# EAGLE board display_driver (EAGLE 7.1.0)
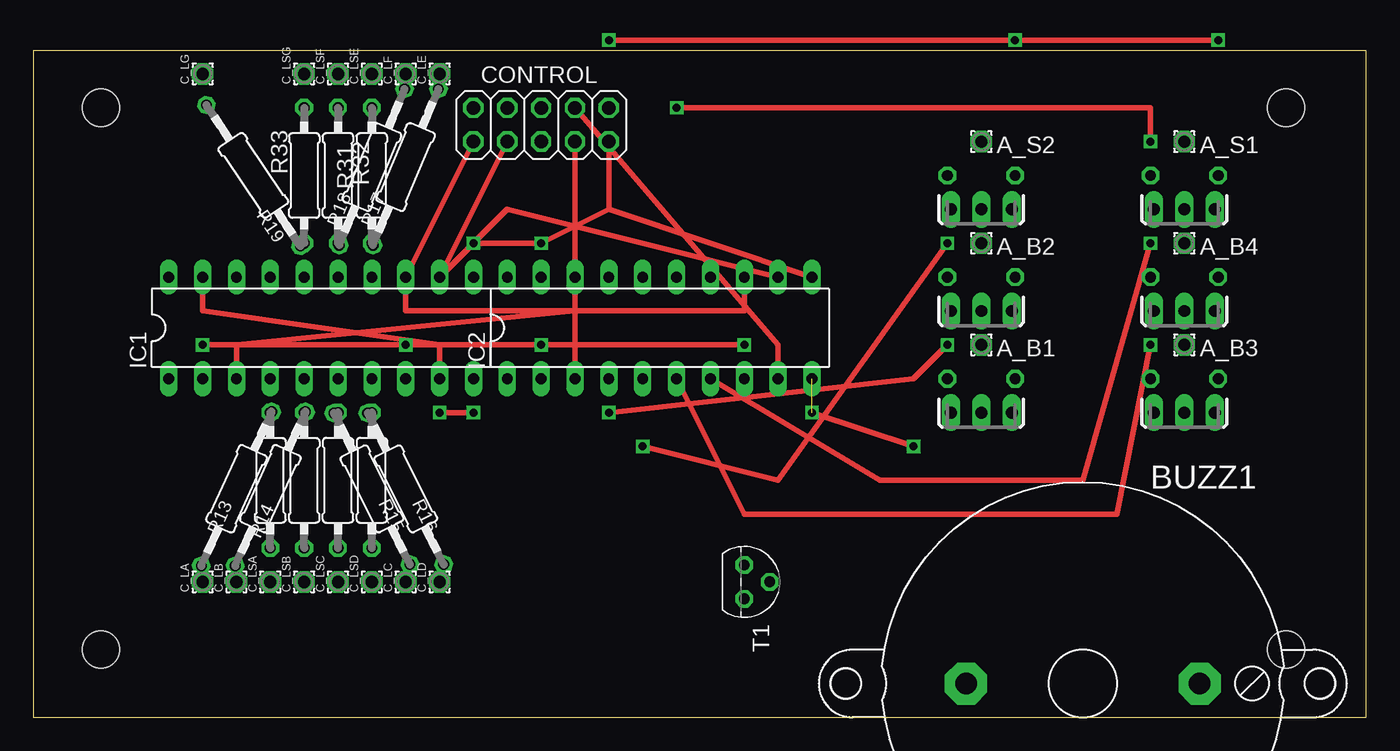
[diagram p0: board, top side]
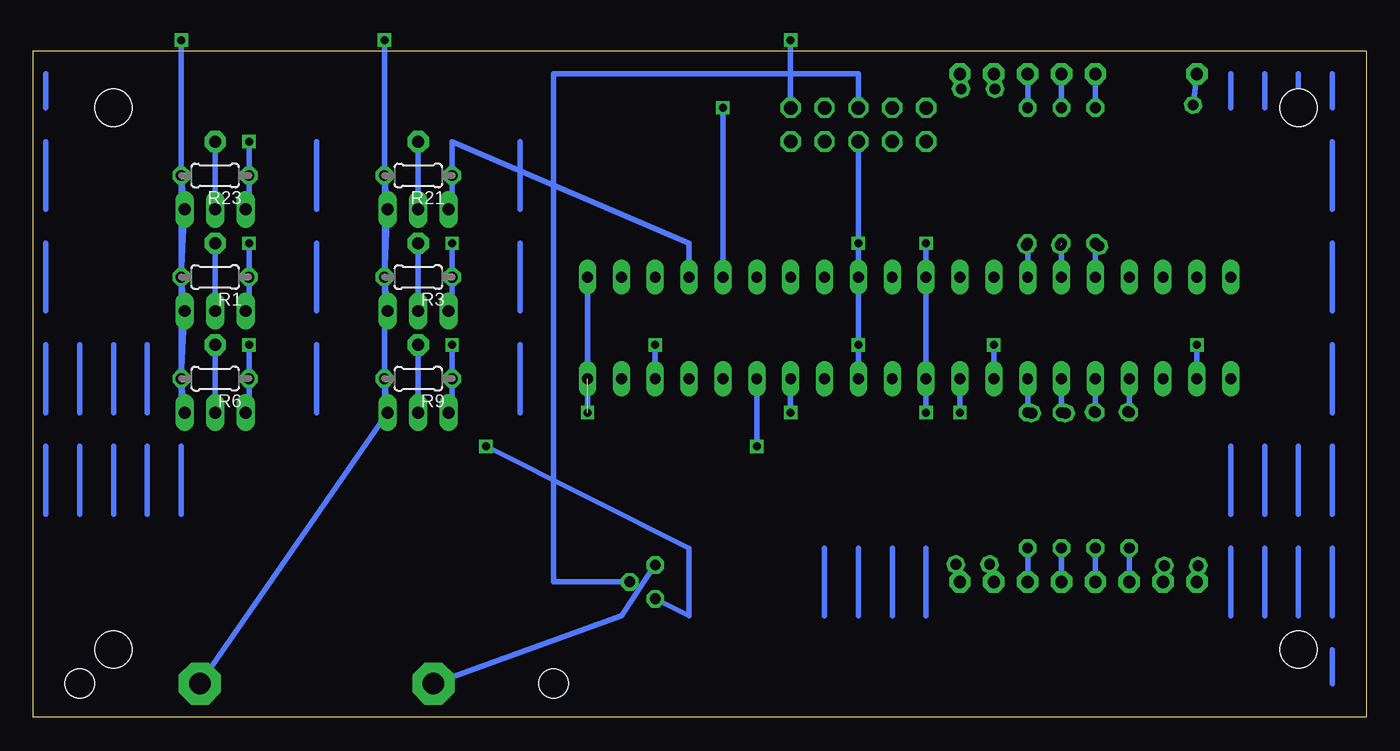
[diagram p1: board, bottom side, seen from below]

Size 100 x 50 mm. Coordinates in mm from the lower left corner, seen from the top.
Outline: 0,0 100,0 100,50 0,50 0,0
Copper layers (1*16): Top 0.035mm / dielectric 1.5mm / Bottom 0.035mm
Design rules "default *": minimum track width 10mil, minimum drill 24mil, track to track 8mil, track to pad 8mil, pad to pad 8mil, via to via 8mil, smd to smd 8mil, copper to edge 40mil, drill to drill 8mil, minimum pad ring 10mil, minimum via ring 8mil, stop-mask expansion 4mil, vias tented up to drill 0mil, thermal gap 10mil
Holes 2.8 mm at 93.98,5.08 93.98,45.72 5.08,5.08 5.08,45.72

## Footprints (pad centres in the part's own frame; a part is rotated, then mirrored left to right if it is on the bottom)
1,6/0,9 = drill 0.914 pad 1.6 octagon: 1 0,0
F/BC40 = drill 1.6 pad 3.15 octagon: + 8.763,0; - -8.763,0 | hole 2.21: 17.78,0; -17.78,0
2X05 = drill 1.016 octagon: 1 -5.08,-1.27; 2 -5.08,1.27; 3 -2.54,-1.27; 4 -2.54,1.27; 5 0,-1.27; 6 0,1.27; 7 2.54,-1.27; 8 2.54,1.27; 9 5.08,-1.27; 10 5.08,1.27
DIL20 = drill 0.813 long: 1 -11.43,-3.81; 2 -8.89,-3.81; 3 -6.35,-3.81; 4 -3.81,-3.81; 5 -1.27,-3.81; 6 1.27,-3.81; 7 3.81,-3.81; 8 6.35,-3.81; 9 8.89,-3.81; 10 11.43,-3.81; 11 11.43,3.81; 12 8.89,3.81; 13 6.35,3.81; 14 3.81,3.81; 15 1.27,3.81; 16 -1.27,3.81; 17 -3.81,3.81; 18 -6.35,3.81; 19 -8.89,3.81; 20 -11.43,3.81
TO251AA-V = drill 0.889 long: 1 -2.286,0; 2 0,0; 3 2.286,0
0204/5 = drill 0.813 octagon: 1 -2.54,0; 2 2.54,0
0207/12 = drill 0.813 octagon: 1 -6.35,0; 2 6.35,0
0207/10 = drill 0.813 octagon: 1 -5.08,0; 2 5.08,0
TO92 = drill 0.813 octagon: 1 1.27,0; 2 0,1.905; 3 -1.27,0

## Placement (x,y rotation side)
A_B1  [1,6/0,9]  71.12,27.94 0 top
A_B2  [1,6/0,9]  71.12,35.56 0 top
A_B3  [1,6/0,9]  86.36,27.94 0 top
A_B4  [1,6/0,9]  86.36,35.56 0 top
A_S1  [1,6/0,9]  86.36,43.18 0 top
A_S2  [1,6/0,9]  71.12,43.18 0 top
BUZZ1  F/BC40  [F/BC40]  78.74,2.54 0 top
C_LA  [1,6/0,9]  12.7,10.16 90 top
C_LB  [1,6/0,9]  15.24,10.16 90 top
C_LC  [1,6/0,9]  27.94,10.16 90 top
C_LD  [1,6/0,9]  30.48,10.16 90 top
C_LE  [1,6/0,9]  30.48,48.26 90 top
C_LF  [1,6/0,9]  27.94,48.26 90 top
C_LG  [1,6/0,9]  12.7,48.26 90 top
C_LSA  [1,6/0,9]  17.78,10.16 90 top
C_LSB  [1,6/0,9]  20.32,10.16 90 top
C_LSC  [1,6/0,9]  22.86,10.16 90 top
C_LSD  [1,6/0,9]  25.4,10.16 90 top
C_LSE  [1,6/0,9]  25.4,48.26 90 top
C_LSF  [1,6/0,9]  22.86,48.26 90 top
C_LSG  [1,6/0,9]  20.32,48.26 90 top
CONTROL  JP_1  [2X05]  38.1,44.45 0 top
IC1  TPIC6B595N  [DIL20]  21.59,29.21 0 top
IC2  TPIC6B595N  [DIL20]  46.99,29.21 0 top
Q1  IRFU9024V  [TO251AA-V]  71.12,22.86 0 top
Q2  IRFU9024V  [TO251AA-V]  71.12,30.48 0 top
Q3  IRFU9024V  [TO251AA-V]  86.36,22.86 0 top
Q4  IRFU9024V  [TO251AA-V]  86.36,30.48 0 top
Q5  IRFU9024V  [TO251AA-V]  86.36,38.1 0 top
Q6  IRFU9024V  [TO251AA-V]  71.12,38.1 0 top
R1  22k  [0204/5]  86.36,33.02 180 bottom
R3  22k  [0204/5]  71.12,33.02 180 bottom
R6  22k  [0204/5]  86.36,25.4 180 bottom
R9  22k  [0204/5]  71.12,25.4 180 bottom
R13  22R  [0207/12]  15.24,17.14 245.5 top
R14  22R  [0207/12]  17.78,17.14 245.5 top
R15  22R  [0207/12]  25.4,17.14 296.7 top
R16  22R  [0207/12]  27.94,17.14 296.7 top
R17  22R  [0207/12]  27.94,41.27 67.3 top
R18  22R  [0207/12]  25.4,41.27 67.3 top
R19  22R  [0207/12]  16.51,40.64 123.7 top
R21  22k  [0204/5]  71.12,40.64 180 bottom
R23  22k  [0204/5]  86.36,40.64 180 bottom
R27  56R  [0207/10]  17.78,17.78 270 top
R28  56R  [0207/10]  20.32,17.78 270 top
R29  56R  [0207/10]  22.86,17.78 270 top
R30  56R  [0207/10]  25.4,17.78 270 top
R31  56R  [0207/10]  25.4,40.64 90 top
R32  56R  [0207/10]  22.86,40.64 90 top
R33  56R  [0207/10]  20.32,40.64 90 top
T1  BC547  [TO92]  53.34,10.16 270 top

## Library data of the parts
A_B1-A_B4 A_S1 A_S2 C_LA C_LB C_LC C_LD C_LE C_LF C_LG C_LSA C_LSB C_LSC C_LSD C_LSE C_LSF C_LSG = wirepad
BUZZ1 = buzzer; OC_FARNELL: unknown; OC_NEWARK: unknown
CONTROL = pinhead
IC1 IC2 = NumericDisplay
Q1-Q6 = MINE
R1 R3 R6 R9 R13-R19 R21 R23 R27-R33 = resistor
T1 = transistor

## Nets
+12V: BUZZ1.+ CONTROL.10 Q1.3 Q2.3 Q3.3 Q4.3 Q5.3 Q6.3 R1.2 R3.2 R6.2 R9.2 R21.2 R23.2
B_1: IC2.4 Q1.1 R9.1
B_2: IC2.5 Q2.1 R3.1
B_3: IC2.6 Q3.1 R6.1
B_4: IC2.7 Q4.1 R1.1
BUZZ_CTL: CONTROL.6 T1.2
D0: IC1.4 R13.1 R27.1
D1: IC1.5 R14.1 R28.1
D2: IC1.6 R15.1 R29.1
D3: IC1.7 R16.1 R30.1
D4: IC1.14 R17.1 R31.1
D5: IC1.15 R18.1 R32.1
D6: IC1.16 R19.1 R33.1
G: CONTROL.8 IC2.9
GND: CONTROL.9 IC1.9 IC1.10 IC1.11 IC1.19 IC2.10 IC2.11 IC2.19 T1.1
L_A: C_LA.1 R13.2
L_B: C_LB.1 R14.2
L_C: C_LC.1 R15.2
L_D: C_LD.1 R16.2
L_E: C_LE.1 R17.2
L_F: C_LF.1 R18.2
L_G: C_LG.1 R19.2
LS_A: C_LSA.1 R27.2
LS_B: C_LSB.1 R28.2
LS_C: C_LSC.1 R29.2
LS_D: C_LSD.1 R30.2
LS_E: C_LSE.1 R31.2
LS_F: C_LSF.1 R32.2
LS_G: C_LSG.1 R33.2
N$1: A_B1.1 Q1.2
N$2: BUZZ1.- T1.3
N$4: A_B2.1 Q2.2
N$9: A_B3.1 Q3.2
N$12: A_B4.1 Q4.2
N$17: IC1.3 IC2.18
N$42: A_S2.1 Q6.2
N$47: A_S1.1 Q5.2
RCK: CONTROL.3 IC1.12 IC2.12
S_1: IC2.15 Q5.1 R23.1
S_2: IC2.14 Q6.1 R21.1
SER_IN: CONTROL.7 IC2.3
SRCK: CONTROL.1 IC1.13 IC2.13
VCC: CONTROL.5 IC1.2 IC1.8 IC2.2 IC2.8

## Tracks (layer width: path | path; a pad name or v marks a point on that pad's centre or on a via)
+12V  (via drill 0.6)
  Top 0.406: v43.18,50.8 v73.66,50.8 v88.9,50.8
  Bottom 0.406: R1.2 Q5.3 R23.2 | R21.2 Q6.3 R3.2 | Q2.3 R3.2 | R6.2 Q4.3 R1.2 | R23.2 R1.2 | R1.2 R6.2 | R6.2 Q3.3 | R21.2 R3.2 | R3.2 R9.2 Q1.3 BUZZ1.+ | CONTROL.10 v43.18,50.8 | v73.66,50.8 R21.2 | R23.2 v88.9,50.8
B_1  (via drill 0.6)
  Top 0.406: v43.18,22.86 66.04,25.4 v68.58,27.94
  Bottom 0.406: IC2.4 v43.18,22.86 | v68.58,27.94 R9.1 68.58,22.86 Q1.1
B_2  (via drill 0.6)
  Top 0.406: v45.72,20.32 55.88,17.78 v68.58,35.56
  Bottom 0.406: IC2.5 v45.72,20.32 | v68.58,35.56 R3.1 68.58,30.48 Q2.1
B_3  (via drill 0.6)
  Top 0.406: IC2.6 53.34,15.24 81.28,15.24 v83.82,27.94
  Bottom 0.406: v83.82,27.94 R6.1 83.82,22.86 Q3.1
B_4  (via drill 0.6)
  Top 0.406: IC2.7 63.5,17.78 78.74,17.78 v83.82,35.56
  Bottom 0.406: v83.82,35.56 R1.1 83.82,30.48 Q4.1
BUZZ_CTL
  Bottom 0.406: CONTROL.6 38.1,48.26 60.96,48.26 60.96,10.16 T1.2
D0
  Bottom 0.406: IC1.4 R27.1 17.84,22.92 R13.1
D1
  Bottom 0.406: IC1.5 R28.1 20.38,22.92 R14.1
D2  (via drill 0.6)
  Bottom 0.406: v22.84,25.4 IC1.6 R29.1 22.59,22.86 R15.1
D3  (via drill 0.6)
  Bottom 0.406: IC1.7 v25.39,25.4 25.39,22.88 R30.1 25.36,22.82 R16.1
D4
  Bottom 0.406: IC1.14 R31.1 25.49,35.47 R17.1
D5  (1 unrouted)
  Bottom 0.406: IC1.15 R32.1
D6
  Bottom 0.406: IC1.16 R33.1 20.24,35.56 R19.1
G
  Top 0.406: CONTROL.8 55.88,27.94 IC2.9
GND  (via drill 0.6)  (1 unrouted)
  Top 0.406: IC1.19 12.7,30.48 30.48,27.94 IC1.9 | v33.02,22.86 v30.48,22.86 | v58.42,22.86 v66.04,20.32 | v33.02,35.56 v38.1,35.56 43.18,38.1 | 43.18,38.1 CONTROL.9 | IC2.11 43.18,38.1
  Bottom 0.406: v33.02,22.86 IC1.10 IC1.11 v33.02,35.56 | v30.48,22.86 IC1.9 | IC2.11 v58.42,22.86 | IC2.19 v38.1,35.56 | v66.04,20.32 50.8,12.7 50.8,7.62 T1.1
L_A
  Bottom 0.406: R13.2 C_LA.1
L_B
  Bottom 0.406: R14.2 C_LB.1
L_C
  Bottom 0.406: R15.2 C_LC.1
L_D
  Bottom 0.406: R16.2 C_LD.1
L_E
  Bottom 0.406: R17.2 C_LE.1
L_F
  Bottom 0.406: C_LF.1 R18.2
L_G
  Bottom 0.406: R19.2 C_LG.1
LS_A
  Bottom 0.406: R27.2 C_LSA.1
LS_B
  Bottom 0.406: R28.2 C_LSB.1
LS_C
  Bottom 0.406: R29.2 C_LSC.1
LS_D
  Bottom 0.406: R30.2 C_LSD.1
LS_E
  Bottom 0.406: R31.2 C_LSE.1
LS_F
  Bottom 0.406: R32.2 C_LSF.1
LS_G
  Bottom 0.406: R33.2 C_LSG.1
N$1
  Bottom 0.406: Q1.2 A_B1.1
N$2
  Bottom 0.406: T1.3 55.88,7.62 BUZZ1.-
N$4
  Bottom 0.406: Q2.2 A_B2.1
N$9
  Bottom 0.406: Q3.2 A_B3.1
N$12
  Bottom 0.406: Q4.2 A_B4.1
N$17
  Top 0.406: IC1.3 15.24,27.94 40.64,30.48 IC2.18
N$18
  Bottom 0.406: 99.06,15.24 99.06,20.32
N$19
  Bottom 0.406: 2.54,15.24 2.54,20.32
N$20
  Bottom 0.406: 2.54,22.86 2.54,27.94
N$21
  Bottom 0.406: 2.54,30.48 2.54,35.56
N$22
  Bottom 0.406: 2.54,38.1 2.54,43.18
N$23
  Bottom 0.406: 2.54,45.72 2.54,48.26
N$24
  Bottom 0.406: 99.06,22.86 99.06,27.94
N$25
  Bottom 0.406: 99.06,30.48 99.06,35.56
N$26
  Bottom 0.406: 99.06,38.1 99.06,43.18
N$27
  Bottom 0.406: 99.06,45.72 99.06,48.26
N$28
  Bottom 0.406: 5.08,20.32 5.08,15.24
N$29
  Bottom 0.406: 7.62,20.32 7.62,15.24
N$30
  Bottom 0.406: 10.16,20.32 10.16,15.24
N$31
  Bottom 0.406: 96.52,27.94 96.52,22.86
N$32
  Bottom 0.406: 93.98,27.94 93.98,22.86
N$33
  Bottom 0.406: 91.44,27.94 91.44,22.86
N$34
  Bottom 0.406: 5.08,45.72 5.08,48.26
N$35
  Bottom 0.406: 7.62,48.26 7.62,45.72
N$36
  Bottom 0.406: 10.16,48.26 10.16,45.72
N$39
  Bottom 0.406: 96.52,20.32 96.52,15.24
N$40
  Bottom 0.406: 93.98,20.32 93.98,15.24
N$41
  Bottom 0.406: 91.44,20.32 91.44,15.24
N$42
  Bottom 0.406: Q6.2 A_S2.1
N$47
  Bottom 0.406: Q5.2 A_S1.1
N$50
  Bottom 0.406: 88.9,20.32 88.9,15.24
N$51
  Bottom 0.406: 2.54,12.7 2.54,7.62
N$52
  Bottom 0.406: 2.54,5.08 2.54,2.54
N$53
  Bottom 0.406: 5.08,12.7 5.08,7.62
N$54
  Bottom 0.406: 7.62,12.7 7.62,7.62
N$55
  Bottom 0.406: 10.16,12.7 10.16,7.62
N$57
  Bottom 0.406: 33.02,12.7 33.02,7.62
N$58
  Bottom 0.406: 35.56,12.7 35.56,7.62
N$60
  Bottom 0.406: 38.1,12.7 38.1,7.62
N$62
  Bottom 0.406: 40.64,12.7 40.64,7.62
N$143
  Bottom 0.406: 60.96,22.86 60.96,27.94
N$144
  Bottom 0.406: 60.96,30.48 60.96,35.56
N$148
  Bottom 0.406: 63.5,22.86 63.5,27.94
N$149
  Bottom 0.406: 63.5,30.48 63.5,35.56
N$150
  Bottom 0.406: 63.5,38.1 63.5,43.18
N$158
  Bottom 0.406: 68.58,22.86 68.58,27.94
N$159
  Bottom 0.406: 68.58,30.48 68.58,35.56
N$163
  Bottom 0.406: 71.12,22.86 71.12,27.94
N$164
  Bottom 0.406: 71.12,30.48 71.12,35.56
N$165
  Bottom 0.406: 71.12,38.1 71.12,43.18
N$168
  Bottom 0.406: 73.66,22.86 73.66,27.94
N$169
  Bottom 0.406: 73.66,30.48 73.66,35.56
N$170
  Bottom 0.406: 73.66,38.1 73.66,43.18
N$178
  Bottom 0.406: 78.74,22.86 78.74,27.94
N$179
  Bottom 0.406: 78.74,30.48 78.74,35.56
N$180
  Bottom 0.406: 78.74,38.1 78.74,43.18
N$187
  Bottom 0.406: 83.82,22.86 83.82,27.94
N$188
  Bottom 0.406: 83.82,30.48 83.82,35.56
N$189
  Bottom 0.406: 83.82,38.1 83.82,43.18
N$192
  Bottom 0.406: 86.36,22.86 86.36,27.94
N$193
  Bottom 0.406: 86.36,30.48 86.36,35.56
N$194
  Bottom 0.406: 86.36,38.1 86.36,43.18
N$197
  Bottom 0.406: 88.9,27.94 88.9,22.86
N$198
  Bottom 0.406: 88.9,30.48 88.9,35.56
N$199
  Bottom 0.406: 88.9,38.1 88.9,43.18
RCK
  Top 0.406: IC2.12 35.56,38.1 IC1.12 CONTROL.3
S_1  (via drill 0.6)
  Top 0.406: v48.26,45.72 83.82,45.72 v83.82,43.18
  Bottom 0.406: IC2.15 v48.26,45.72 | v83.82,43.18 R23.1 83.82,38.1 Q5.1
S_2
  Bottom 0.406: IC2.14 50.8,35.56 68.58,43.18 R21.1 68.58,38.1 Q6.1
SER_IN
  Top 0.406: IC2.3 CONTROL.7
SRCK
  Top 0.406: CONTROL.1 IC1.13 27.94,30.48 53.34,30.48 IC2.13
VCC  (via drill 0.6)
  Top 0.406: v12.7,27.94 v27.94,27.94 v38.1,27.94 v53.34,27.94
  Bottom 0.406: IC1.2 v12.7,27.94 | v27.94,27.94 IC1.8 | IC2.2 v38.1,27.94 CONTROL.5 | IC2.8 v53.34,27.94